# EAGLE board CT_schematic (EAGLE 7.6.0)

Size 100 x 80 mm. Coordinates in mm from the lower left corner, seen from the top.
Outline: 0,0 100,0 100,80 0,80 0,0
Copper layers (1*16): Top 0.035mm / dielectric 1.5mm / Bottom 0.035mm
Design rules "default": minimum track width 10mil, minimum drill 24mil, track to track 8mil, track to pad 8mil, pad to pad 8mil, via to via 8mil, smd to smd 8mil, copper to edge 40mil, drill to drill 8mil, minimum pad ring 10mil, minimum via ring 8mil, stop-mask expansion 4mil, vias tented up to drill 0mil, thermal gap 10mil

## Footprints (pad centres in the part's own frame; a part is rotated, then mirrored left to right if it is on the bottom)
C0603 = smd 0.8 x 0.8: 1 -0.762,0; 2 0.762,0
C0402 = smd 0.5 x 0.5: 1 -0.508,0; 2 0.508,0
2220 = smd 1.85 x 5.5: 1 -2.55,0; 2 2.55,0
C1210 = smd 1.2 x 2.5: 1 -1.524,0; 2 1.524,0
C1206 = smd 1.3 x 1.6: 1 -1.524,0; 2 1.524,0
L0603 = smd 0.8 x 0.8: 1 -0.762,0; 2 0.762,0
R0603 = smd 0.8 x 0.8: 1 -0.762,0; 2 0.762,0
LQFP176 = smd 0.3 x 1.2: 1 -10.75,-12.75; 2 -10.25,-12.75; 3 -9.75,-12.75; 4 -9.25,-12.75; 5 -8.75,-12.75; 6 -8.25,-12.75; 7 -7.75,-12.75; 8 -7.25,-12.75; 9 -6.75,-12.75; 10 -6.25,-12.75; 11 -5.75,-12.75; 12 -5.25,-12.75; 13 -4.75,-12.75; 14 -4.25,-12.75; 15 -3.75,-12.75; 16 -3.25,-12.75; 17 -2.75,-12.75; 18 -2.25,-12.75; 19 -1.75,-12.75; 20 -1.25,-12.75; 21 -0.75,-12.75; 22 -0.25,-12.75; 23 0.25,-12.75; 24 0.75,-12.75; 25 1.25,-12.75; 26 1.75,-12.75; 27 2.25,-12.75; 28 2.75,-12.75; 29 3.25,-12.75; 30 3.75,-12.75; 31 4.25,-12.75; 32 4.75,-12.75; 33 5.25,-12.75; 34 5.75,-12.75; 35 6.25,-12.75; 36 6.75,-12.75; 37 7.25,-12.75; 38 7.75,-12.75; 39 8.25,-12.75; 40 8.75,-12.75; 41 9.25,-12.75; 42 9.75,-12.75; 43 10.25,-12.75; 44 10.75,-12.75; 89 10.75,12.75; 90 10.25,12.75; 91 9.75,12.75; 92 9.25,12.75; 93 8.75,12.75; 94 8.25,12.75; 95 7.75,12.75; 96 7.25,12.75; 97 6.75,12.75; 98 6.25,12.75; 99 5.75,12.75; 100 5.25,12.75; 101 4.75,12.75; 102 4.25,12.75; 103 3.75,12.75; 104 3.25,12.75; 105 2.75,12.75; 106 2.25,12.75; 107 1.75,12.75; 108 1.25,12.75; 109 0.75,12.75; 110 0.25,12.75; 111 -0.25,12.75; 112 -0.75,12.75; 113 -1.25,12.75; 114 -1.75,12.75; 115 -2.25,12.75; 116 -2.75,12.75; 117 -3.25,12.75; 118 -3.75,12.75; 119 -4.25,12.75; 120 -4.75,12.75; 121 -5.25,12.75; 122 -5.75,12.75; 123 -6.25,12.75; 124 -6.75,12.75; 125 -7.25,12.75; 126 -7.75,12.75; 127 -8.25,12.75; 128 -8.75,12.75; 129 -9.25,12.75; 130 -9.75,12.75; 131 -10.25,12.75; 132 -10.75,12.75 | smd 1.2 x 0.3: 45 12.75,-10.75; 46 12.75,-10.25; 47 12.75,-9.75; 48 12.75,-9.25; 49 12.75,-8.75; 50 12.75,-8.25; 51 12.75,-7.75; 52 12.75,-7.25; 53 12.75,-6.75; 54 12.75,-6.25; 55 12.75,-5.75; 56 12.75,-5.25; 57 12.75,-4.75; 58 12.75,-4.25; 59 12.75,-3.75; 60 12.75,-3.25; 61 12.75,-2.75; 62 12.75,-2.25; 63 12.75,-1.75; 64 12.75,-1.25; 65 12.75,-0.75; 66 12.75,-0.25; 67 12.75,0.25; 68 12.75,0.75; 69 12.75,1.25; 70 12.75,1.75; 71 12.75,2.25; 72 12.75,2.75; 73 12.75,3.25; 74 12.75,3.75; 75 12.75,4.25; 76 12.75,4.75; 77 12.75,5.25; 78 12.75,5.75; 79 12.75,6.25; 80 12.75,6.75; 81 12.75,7.25; 82 12.75,7.75; 83 12.75,8.25; 84 12.75,8.75; 85 12.75,9.25; 86 12.75,9.75; 87 12.75,10.25; 88 12.75,10.75; 133 -12.75,10.75; 134 -12.75,10.25; 135 -12.75,9.75; 136 -12.75,9.25; 137 -12.75,8.75; 138 -12.75,8.25; 139 -12.75,7.75; 140 -12.75,7.25; 141 -12.75,6.75; 142 -12.75,6.25; 143 -12.75,5.75; 144 -12.75,5.25; 145 -12.75,4.75; 146 -12.75,4.25; 147 -12.75,3.75; 148 -12.75,3.25; 149 -12.75,2.75; 150 -12.75,2.25; 151 -12.75,1.75; 152 -12.75,1.25; 153 -12.75,0.75; 154 -12.75,0.25; 155 -12.75,-0.25; 156 -12.75,-0.75; 157 -12.75,-1.25; 158 -12.75,-1.75; 159 -12.75,-2.25; 160 -12.75,-2.75; 161 -12.75,-3.25; 162 -12.75,-3.75; 163 -12.75,-4.25; 164 -12.75,-4.75; 165 -12.75,-5.25; 166 -12.75,-5.75; 167 -12.75,-6.25; 168 -12.75,-6.75; 169 -12.75,-7.25; 170 -12.75,-7.75; 171 -12.75,-8.25; 172 -12.75,-8.75; 173 -12.75,-9.25; 174 -12.75,-9.75; 175 -12.75,-10.25; 176 -12.75,-10.75
TST-110-05-T-D-RA = drill 1 pad 1.7 square: 1 0,0 | drill 1 pad 1.7: 2 0,2.54; 3 2.54,0; 4 2.54,2.54; 5 5.08,0; 6 5.08,2.54; 7 7.62,0; 8 7.62,2.54; 9 10.16,0; 10 10.16,2.54; 11 12.7,0; 12 12.7,2.54; 13 15.24,0; 14 15.24,2.54; 15 17.78,0; 16 17.78,2.54; 17 20.32,0; 18 20.32,2.54; 19 22.86,0; 20 22.86,2.54
SOT-23-8 = smd 0.4 x 1.2: 1 -0.975,-1.3; 2 -0.325,-1.3; 3 0.325,-1.3; 4 0.975,-1.3; 5 0.975,1.3; 6 0.325,1.3; 7 -0.325,1.3; 8 -0.975,1.3
182-009-MALE = drill 1.194 pad 1.524 octagon: 1 -5.537,10.923; 2 -2.769,10.923; 3 0,10.923; 4 2.769,10.923; 5 5.537,10.923; 6 -4.153,8.08; 7 -1.384,8.08; 8 1.384,8.08; 9 4.153,8.08 | hole 3.048: -12.446,9.501; 12.446,9.501
S29VS256RABBHW000 = smd 0.3 x 0.3: A1 -6,3; A14 0.5,3; C3 -5,2; C4 -4.5,2; C5 -4,2; C6 -3.5,2; C7 -3,2; C8 -2.5,2; C9 -2,2; C10 -1.5,2; C11 -1,2; C12 -0.5,2; D3 -5,1.5; D4 -4.5,1.5; D5 -4,1.5; D6 -3.5,1.5; D7 -3,1.5; D8 -2.5,1.5; D9 -2,1.5; D10 -1.5,1.5; D11 -1,1.5; D12 -0.5,1.5; E3 -5,1; E4 -4.5,1; E5 -4,1; E6 -3.5,1; E7 -3,1; E8 -2.5,1; E9 -2,1; E10 -1.5,1; E11 -1,1; E12 -0.5,1; F3 -5,0.5; F4 -4.5,0.5; F5 -4,0.5; F6 -3.5,0.5; F7 -3,0.5; F8 -2.5,0.5; F9 -2,0.5; F10 -1.5,0.5; F11 -1,0.5; F12 -0.5,0.5; H1 -6,-0.5; H14 0.5,-0.5
FCI_10118193-0001LF = smd 0.4 x 1.35: 1 -1.3,2.675; 2 -0.65,2.675; 3 0,2.675; 4 0.65,2.675; 5 1.3,2.675 | smd 1.6 x 1.4: 6 -3.2,2.45; 7 3.2,2.45 | smd 1.9 x 1.9: 8 -1.2,0; 9 1.2,0 | hole 0.5: -3.3,0; 3.3,0
SOT143B = smd 1 x 0.7: 1 -0.75,-1 | smd 0.6 x 0.7: 2 0.95,-1; 3 0.95,1; 4 -0.95,1
ASEK = smd 1.4 x 1: 1 -1.1,-0.8; 2 1.1,-0.8; 3 1.1,0.8; 4 -1.1,0.8
ASFL1 = smd 1.7 x 1.5: 1 -1.27,-1.1; 2 1.27,-1.1; 3 1.27,1.1; 4 -1.27,1.1
MSOP-8_EP = smd 1.422 x 0.508: 1 -2.095,0.975; 2 -2.095,0.325; 3 -2.095,-0.325; 4 -2.095,-0.975; 5 2.095,-0.975; 6 2.095,-0.325; 7 2.095,0.325; 8 2.095,0.975 | smd 1.727 x 1.702: EPAD 0,0
SOIC-8_EP = smd 1.6 x 0.533: 1 -2.921,1.905; 2 -2.921,0.635; 3 -2.921,-0.635; 4 -2.921,-1.905; 5 2.921,-1.905; 6 2.921,-0.635; 7 2.921,0.635; 8 2.921,1.905 | smd 2.54 x 3.302: EPAD 0,0 | drill 0.406 pad 0.406: P$1 -0.508,0.635; P$2 0.381,0.635; P$3 -0.508,-0.635; P$4 0.381,-0.635
DFN8_2X3MC = smd 0.813 x 0.305: 1 -1.398,0.75; 2 -1.398,0.25; 3 -1.398,-0.25; 4 -1.398,-0.75; 5 1.398,-0.75; 6 1.398,-0.25; 7 1.398,0.25; 8 1.398,0.75 | smd 1.753 x 1.549: 9 0,0
JST-2-SMD = smd 1 x 4.6: 1 -1,-3.7; 2 1,-3.7 | smd 1.6 x 3.4: NC1 -3.4,1.5; NC2 3.4,1.5
SON-6 = smd 0.55 x 0.3: 1 -0.355,0.5 | smd 0.52 x 0.3: 2 -0.37,0; 3 -0.37,-0.5; 4 0.37,-0.5; 5 0.37,0; 6 0.37,0.5
DCU0008A_N = smd 0.5 x 0.3: 1 -1.6,0.75; 2 -1.6,0.25; 3 -1.6,-0.25; 4 -1.6,-0.75; 5 1.6,-0.75; 6 1.6,-0.25; 7 1.6,0.25; 8 1.6,0.75
SW_4-1437565-2 = smd 1.4 x 2.1: 1 -2.23,4.55; 2 -2.23,-4.55; 3 2.23,4.55; 4 2.23,-4.55
LGM67K-G1J2-24-Z = smd 0.8 x 1.4: A -2,0; C 0,0
NC7SZ125M5X = smd 1.3 x 0.7: 1 -1.3,0.95; 2 -1.3,0; 3 -1.3,-0.95; 4 1.3,-0.95; 5 1.3,0.95
DUMMY_PACKAGE_209 = drill 0.3: 1 0,-1; 2 1.5,-1; 3 3,-1

## Placement (x,y rotation side)
C1  1e-06  [C0603]  -38.1,71.12 0 top  (outside the outline)
C2  1e-07  [C0603]  -41.91,71.12 0 top  (outside the outline)
C3  1e-07  [C0603]  -45.72,71.12 0 top  (outside the outline)
C4  1e-07  [C0603]  -49.53,71.12 0 top  (outside the outline)
C5  1e-07  [C0603]  -53.34,71.12 0 top  (outside the outline)
C6  1e-07  [C0603]  -57.15,71.12 0 top  (outside the outline)
C7  1e-07  [C0603]  -60.96,71.12 0 top  (outside the outline)
C8  1e-07  [C0603]  -64.77,71.12 0 top  (outside the outline)
C9  1e-07  [C0603]  -68.58,71.12 0 top  (outside the outline)
C10  1e-07  [C0603]  -72.39,71.12 0 top  (outside the outline)
C11  1e-07  [C0603]  -76.2,71.12 0 top  (outside the outline)
C12  1e-07  [C0603]  -80.01,71.12 0 top  (outside the outline)
C13  1e-07  [C0603]  -15.24,76.2 0 top  (outside the outline)
C14  1e-07  [C0603]  -19.05,76.2 0 top  (outside the outline)
C15  1e-07  [C0603]  -22.86,76.2 0 top  (outside the outline)
C16  1e-07  [C0603]  -26.67,76.2 0 top  (outside the outline)
C17  1e-07  [C0603]  -30.48,76.2 0 top  (outside the outline)
C18  4.7e-06  [C0603]  -19.05,71.12 0 top  (outside the outline)
C19  1e-08  [C0603]  -34.29,76.2 0 top  (outside the outline)
C20  1e-06  [C0603]  -38.1,76.2 0 top  (outside the outline)
C21  2.2e-06  [C0603]  -22.86,71.12 0 top  (outside the outline)
C22  2.2e-06  [C0603]  -26.67,71.12 0 top  (outside the outline)
C23  1e-06  [C0603]  -41.91,76.2 0 top  (outside the outline)
C24  1e-07  [C0402]  -15.24,81.28 0 top  (outside the outline)
C25  1e-07  [C0402]  -19.05,81.28 0 top  (outside the outline)
C26  1e-07  [C0402]  -22.86,81.28 0 top  (outside the outline)
C27  2.2e-06  [C0603]  -30.48,71.12 0 top  (outside the outline)
C28  1e-07  [C0402]  -26.67,81.28 0 top  (outside the outline)
C29  2.2e-06  [C0603]  -34.29,71.12 0 top  (outside the outline)
C30  1e-08  [C0402]  -30.48,81.28 0 top  (outside the outline)
C31  1e-08  [C0402]  -34.29,81.28 0 top  (outside the outline)
C32  6.8e-05  [2220]  -50.8,33.02 0 top  (outside the outline)
C33  1e-06  [C0603]  -45.72,76.2 0 top  (outside the outline)
C34  6.8e-05  [2220]  -58.42,33.02 0 top  (outside the outline)
C35  1e-05  [C1210]  -57.15,53.34 0 top  (outside the outline)
C36  1e-05  [C1210]  -63.5,53.34 0 top  (outside the outline)
C37  1e-05  [C1210]  -69.85,53.34 0 top  (outside the outline)
C38  1e-05  [C1210]  -76.2,53.34 0 top  (outside the outline)
C39  1e-07  [C0402]  -38.1,81.28 0 top  (outside the outline)
C40  1e-05  [C1206]  -16.51,60.96 0 top  (outside the outline)
C41  1e-05  [C1206]  -22.86,60.96 0 top  (outside the outline)
C42  1e-08  [C0402]  -41.91,81.28 0 top  (outside the outline)
C43  1e-07  [C0402]  -45.72,81.28 0 top  (outside the outline)
C44  1e-08  [C0402]  -49.53,81.28 0 top  (outside the outline)
C45  1e-07  [C0402]  -53.34,81.28 0 top  (outside the outline)
C46  1e-08  [C0402]  -57.15,81.28 0 top  (outside the outline)
C47  1e-08  [C0402]  -60.96,81.28 0 top  (outside the outline)
C48  1e-08  [C0402]  -64.77,81.28 0 top  (outside the outline)
F1  240.0  [L0603]  -49.53,76.2 0 top  (outside the outline)
R2  1000.0  [R0603]  -53.34,76.2 0 top  (outside the outline)
R7  4700.0  [R0603]  -57.15,76.2 0 top  (outside the outline)
R8  4700.0  [R0603]  -60.96,76.2 0 top  (outside the outline)
R9  10000.0  [R0603]  -20.32,66.04 0 top  (outside the outline)
R10  10000.0  [R0603]  -25.4,66.04 0 top  (outside the outline)
R11  10000.0  [R0603]  -30.48,66.04 0 top  (outside the outline)
R12  10000.0  [R0603]  -35.56,66.04 0 top  (outside the outline)
R13  10000.0  [R0603]  -40.64,66.04 0 top  (outside the outline)
R14  120.0  [R0603]  -64.77,76.2 0 top  (outside the outline)
R15  100000.0  [R0603]  -68.58,59.69 0 top  (outside the outline)
R16  10000.0  [R0603]  -45.72,66.04 0 top  (outside the outline)
R17  10000.0  [R0603]  -50.8,66.04 0 top  (outside the outline)
R18  10000.0  [R0603]  -55.88,66.04 0 top  (outside the outline)
R19  10000.0  [R0603]  -60.96,66.04 0 top  (outside the outline)
R20  3900.0  [R0603]  -68.58,76.2 0 top  (outside the outline)
R21  2200.0  [R0603]  -72.39,76.2 0 top  (outside the outline)
R22  10000.0  [R0603]  -66.04,66.04 0 top  (outside the outline)
R23  4031.5447154472  [R0603]  -63.5,59.69 0 top  (outside the outline)
R24  2200.0  [R0603]  -76.2,76.2 0 top  (outside the outline)
R25  10000.0  [R0603]  -71.12,66.04 0 top  (outside the outline)
R26  10000.0  [R0603]  -76.2,66.04 0 top  (outside the outline)
R27  82000.0  [R0603]  -81.28,66.04 0 top  (outside the outline)
R28  300000.0  [R0603]  -73.66,59.69 0 top  (outside the outline)
R29  120000.0  [R0603]  -78.74,59.69 0 top  (outside the outline)
R30  2000.0  [R0603]  -80.01,76.2 0 top  (outside the outline)
R31  10000.0  [R0603]  -15.24,71.12 0 top  (outside the outline)
R32  200000.0  [R0603]  -15.24,66.04 0 top  (outside the outline)
U1  STM32F427IIT6  [LQFP176]  -26.67,13.97 0 top  (outside the outline)
U2  TST-110-05-T-D-RA  [TST-110-05-T-D-RA]  -78.74,41.91 0 top  (outside the outline)
U3  MAX3051EKA+T  [SOT-23-8]  -27.94,59.69 0 top  (outside the outline)
U4  182-009-113R531  [182-009-MALE]  -63.5,6.35 0 top  (outside the outline)
U5  S29VS256RABBHW000  [S29VS256RABBHW000]  -36.83,43.18 0 top  (outside the outline)
U6  10118193-0001LF  [FCI_10118193-0001LF]  -19.05,44.45 0 top  (outside the outline)
U7  prtr5v0u2ax  [SOT143B]  -77.47,81.28 0 top  (outside the outline)
U8  ASEK-32.768KHz-ECST  [ASEK]  -29.21,53.34 0 top  (outside the outline)
U9  ASFL1-25MHZ-NCS  [ASFL1]  -76.2,31.75 0 top  (outside the outline)
U10  MIC47100YMME  [MSOP-8_EP]  -34.29,59.69 0 top  (outside the outline)
U11  MIC5234YME  [SOIC-8_EP]  -36.83,53.34 0 top  (outside the outline)
U12  MCP73831T-2ACI/MC  [DFN8_2X3MC]  -41.91,85.09 0 top  (outside the outline)
U13  S2B-PH-SM4-TB(LF)(SN)  [JST-2-SMD]  -41.91,34.29 0 top  (outside the outline)
U14  TPS3895ADRYR  [SON-6]  -35.56,85.09 0 top  (outside the outline)
U15  LSF0102DCTR  [DCU0008A_N]  -30.48,85.09 0 top  (outside the outline)
U16  4-1437565-2  [SW_4-1437565-2]  -27.94,34.29 0 top  (outside the outline)
U17  Q65110A2395  [LGM67K-G1J2-24-Z]  -45.72,53.34 0 top  (outside the outline)
U18  nc7sz125m5x  [NC7SZ125M5X]  -40.64,59.69 0 top  (outside the outline)
U19  nc7sz125m5x  [NC7SZ125M5X]  -46.99,59.69 0 top  (outside the outline)
U20  nc7sz125m5x  [NC7SZ125M5X]  -53.34,59.69 0 top  (outside the outline)
U21  Dummy  [DUMMY_PACKAGE_209]  -17.78,86.36 0 top  (outside the outline)

## Library data of the parts
C1-C48 F1 R2 R7-R32 U1-U21 = circuit_tree

## Nets
CLK_U1_9: U1.9 U8.3
CLK_U1_29: U1.29 U9.3
GND: C1.2 C2.2 C3.2 C4.2 C5.2 C6.2 C7.2 C8.2 C9.2 C10.2 C11.2 C12.2 C13.2 C14.2 C15.2 C16.2 C17.2 C18.2 C19.2 C20.2 C21.2 C22.2 C23.2 C24.2 C25.2 C26.2 C27.2 C28.2 C29.2 C30.2 C31.2 C32.2 C33.2 C34.2 C35.2 C36.2 C37.2 C38.2 C39.2 C40.2 C41.2 C42.2 C43.2 C44.2 C45.2 C46.2 C47.2 C48.2 R2.2 R11.2 R12.2 R15.2 R21.2 R24.2 R27.2 R29.2 R30.2 U1.14 U1.22 U1.37 U1.61 U1.71 U1.90 U1.102 U1.113 U1.122 U1.126 U1.135 U1.148 U1.158 U2.4 U2.6 U2.8 U2.10 U2.12 U2.14 U2.16 U2.18 U2.20 U3.2 U4.5 U5.C5 U5.D12 U5.E3 U5.F5 U6.5 U6.6 U6.7 U6.8 U6.9 U7.1 U8.2 U9.2 U10.3 U10.EPAD U11.7 U11.EPAD U12.6 U12.9 U13.2 U14.2 U15.1 U17.C U18.2 U18.3 U19.1 U19.3 U20.1 U20.3 U21.1
INPUT_USBPOWER_5V: C23.1 C40.1 R31.2 U1.120 U6.1 U7.4 U12.1 U12.2
NET_U1_31: R8.1 U1.31 U20.4
NET_U1_39: C19.1 C20.1 F1.1 U1.38 U1.39
NET_U1_48: R12.1 U1.48
NET_U1_58: R11.1 U1.58
NET_U1_81: C21.1 U1.81
NET_U1_125: C22.1 U1.125
NET_U1_166: R10.1 U1.166
NET_U1_171: R9.1 U1.171
NET_U1_175: U17.A
NET_U1_176: U16.3 U16.4
NET_U3_6: R14.2 U3.6
NET_U3_8: R15.1 U3.8
NET_U4_2: R14.2 U3.6 U4.2
NET_U4_3: R14.1 U3.7 U4.3
NET_U5_C9: U5.C9
NET_U5_D8: R7.1 U5.D8 U19.4
NET_U10_6: R20.2 R21.1 U10.6
NET_U11_4: R23.2 R24.1 U11.4
NET_U12_5: R31.1 U12.5
NET_U12_8: R30.1 U12.8
NET_U14_1: R26.1 R27.1 U14.1
NET_U14_3: R28.2 R29.1 U14.3
NET_U14_4: R25.1 U14.4 U18.4 U19.2 U20.2
NET_U15_8: R32.1 U15.8
NET_U16_1: R2.1 U16.1 U16.2
PROC_ADC1_IN3: U1.47 U21.2
PROC_ADC1_IN4: U1.50 U21.3
PROC_CAN1_RX_TOIOBUF: U15.4
PROC_CAN1_RX_TOXCVR: U3.4 U15.5
PROC_CAN1_TX_TOIOBUF: U15.3
PROC_CAN1_TX_TOXCVR: U3.1 U15.6
PROC_FMC_A16: U1.99 U5.D4
PROC_FMC_A17: U1.100 U5.C11
PROC_FMC_A18: U1.101 U5.D10
PROC_FMC_A19: U1.2 U5.C10
PROC_FMC_A20: U1.3 U5.D5
PROC_FMC_A21: U1.4 U5.C4
PROC_FMC_A22: U1.5 U5.C12
PROC_FMC_A23: U1.1 U5.D7
PROC_FMC_CLK: U1.145 U5.C6
PROC_FMC_D0: U1.104 U5.F3
PROC_FMC_D1: U1.105 U5.F4
PROC_FMC_D2: U1.142 U5.E6
PROC_FMC_D3: U1.143 U5.E7
PROC_FMC_D4: U1.68 U5.F8
PROC_FMC_D5: U1.69 U5.F9
PROC_FMC_D6: U1.70 U5.E10
PROC_FMC_D7: U1.73 U5.E11
PROC_FMC_D8: U1.74 U5.E4
PROC_FMC_D9: U1.75 U5.E5
PROC_FMC_D10: U1.76 U5.F6
PROC_FMC_D11: U1.77 U5.F7
PROC_FMC_D12: U1.78 U5.E8
PROC_FMC_D13: U1.96 U5.E9
PROC_FMC_D14: U1.97 U5.F11
PROC_FMC_D15: U1.98 U5.F12
PROC_FMC_NE2: R17.1 U1.152 U5.D11
PROC_FMC_NL: U1.165 U5.D6
PROC_FMC_NOE: R19.1 U1.146 U5.E12
PROC_FMC_NWAIT: R16.1 U1.150 U5.C3
PROC_FMC_NWE: R18.1 U1.147 U5.C8
PROC_SYS_JTCK_SWCLK: U1.137 U2.9
PROC_SYS_JTDO_SWO: U1.161 U2.13
PROC_SYS_JTMS_SWDIO: U1.124 U2.7
PROC_USB_OTG_FS_DM: U1.122 U6.2 U7.3
PROC_USB_OTG_FS_DP: U1.123 U6.3 U7.2
RST_OUT_U2_SRESET_B: R13.1 U2.15 U18.1
VCC_S1_3V7: C32.1 C33.1 C35.1 C36.1 C41.1 R22.1 R22.2 U10.1 U10.2 U10.4 U10.5 U11.5 U11.8 U12.3 U12.4 U13.1
VCC_TIER1_1V8: C1.1 C2.1 C3.1 C4.1 C5.1 C6.1 C7.1 C8.1 C9.1 C10.1 C11.1 C12.1 C13.1 C14.1 C15.1 C16.1 C17.1 C18.1 C24.1 C26.1 C27.1 C28.1 C29.1 C34.1 C39.1 C44.1 C45.1 C46.1 C47.1 C48.1 F1.2 R7.2 R8.2 R9.2 R10.2 R13.2 R16.2 R17.2 R18.2 R19.2 R20.1 R25.2 R26.2 R28.1 U1.6 U1.15 U1.23 U1.36 U1.49 U1.62 U1.72 U1.82 U1.91 U1.103 U1.114 U1.127 U1.136 U1.149 U1.159 U1.172 U2.1 U5.C7 U5.D3 U5.F10 U10.7 U10.8 U14.6 U15.2 U18.5 U19.5 U20.5
VCC_TIER1_3V3: C25.1 C30.1 C31.1 C37.1 C38.1 C42.1 C43.1 R23.1 R32.2 U3.3 U8.4 U9.4 U11.1 U15.7

## Tracks (layer width: path | path; a pad name or v marks a point on that pad's centre or on a via)
CLK_U1_9  (1 unrouted)
CLK_U1_29  (1 unrouted)
GND  (109 unrouted)
INPUT_USBPOWER_5V  (7 unrouted)
NET_U1_31  (2 unrouted)
NET_U1_39  (4 unrouted)
NET_U1_48  (1 unrouted)
NET_U1_58  (1 unrouted)
NET_U1_81  (1 unrouted)
NET_U1_125  (1 unrouted)
NET_U1_166  (1 unrouted)
NET_U1_171  (1 unrouted)
NET_U1_176  (1 unrouted)
NET_U3_6  (1 unrouted)
NET_U3_8  (1 unrouted)
NET_U4_2  (2 unrouted)
NET_U4_3  (2 unrouted)
NET_U5_D8  (2 unrouted)
NET_U10_6  (2 unrouted)
NET_U11_4  (2 unrouted)
NET_U12_5  (1 unrouted)
NET_U12_8  (1 unrouted)
NET_U14_1  (2 unrouted)
NET_U14_3  (2 unrouted)
NET_U14_4  (4 unrouted)
NET_U15_8  (1 unrouted)
NET_U16_1  (2 unrouted)
PROC_ADC1_IN3  (1 unrouted)
PROC_ADC1_IN4  (1 unrouted)
PROC_CAN1_RX_TOXCVR  (1 unrouted)
PROC_CAN1_TX_TOXCVR  (1 unrouted)
PROC_FMC_A16  (1 unrouted)
PROC_FMC_A17  (1 unrouted)
PROC_FMC_A18  (1 unrouted)
PROC_FMC_A19  (1 unrouted)
PROC_FMC_A20  (1 unrouted)
PROC_FMC_A21  (1 unrouted)
PROC_FMC_A22  (1 unrouted)
PROC_FMC_A23  (1 unrouted)
PROC_FMC_CLK  (1 unrouted)
PROC_FMC_D0  (1 unrouted)
PROC_FMC_D1  (1 unrouted)
PROC_FMC_D2  (1 unrouted)
PROC_FMC_D3  (1 unrouted)
PROC_FMC_D4  (1 unrouted)
PROC_FMC_D5  (1 unrouted)
PROC_FMC_D6  (1 unrouted)
PROC_FMC_D7  (1 unrouted)
PROC_FMC_D8  (1 unrouted)
PROC_FMC_D9  (1 unrouted)
PROC_FMC_D10  (1 unrouted)
PROC_FMC_D11  (1 unrouted)
PROC_FMC_D12  (1 unrouted)
PROC_FMC_D13  (1 unrouted)
PROC_FMC_D14  (1 unrouted)
PROC_FMC_D15  (1 unrouted)
PROC_FMC_NE2  (2 unrouted)
PROC_FMC_NL  (1 unrouted)
PROC_FMC_NOE  (2 unrouted)
PROC_FMC_NWAIT  (2 unrouted)
PROC_FMC_NWE  (2 unrouted)
PROC_SYS_JTCK_SWCLK  (1 unrouted)
PROC_SYS_JTDO_SWO  (1 unrouted)
PROC_SYS_JTMS_SWDIO  (1 unrouted)
PROC_USB_OTG_FS_DM  (2 unrouted)
PROC_USB_OTG_FS_DP  (2 unrouted)
RST_OUT_U2_SRESET_B  (2 unrouted)
VCC_S1_3V7  (15 unrouted)
VCC_TIER1_1V8  (70 unrouted)
VCC_TIER1_3V3  (13 unrouted)